# Altium PCB SD171-5.0PCB2.PcbDoc (part 2 of 5)
Units mm, origin at the board's own origin, x right, y up, seen from the top; angles counter-clockwise.
Board outline 152.27 x 99.6 mm, 6 copper layers (Top Layer, InternalPlane1, Mid-Layer 1, Mid-Layer 2, InternalPlane2, Bottom Layer); 325 components, 250 nets, 1794 pads, 490 vias.
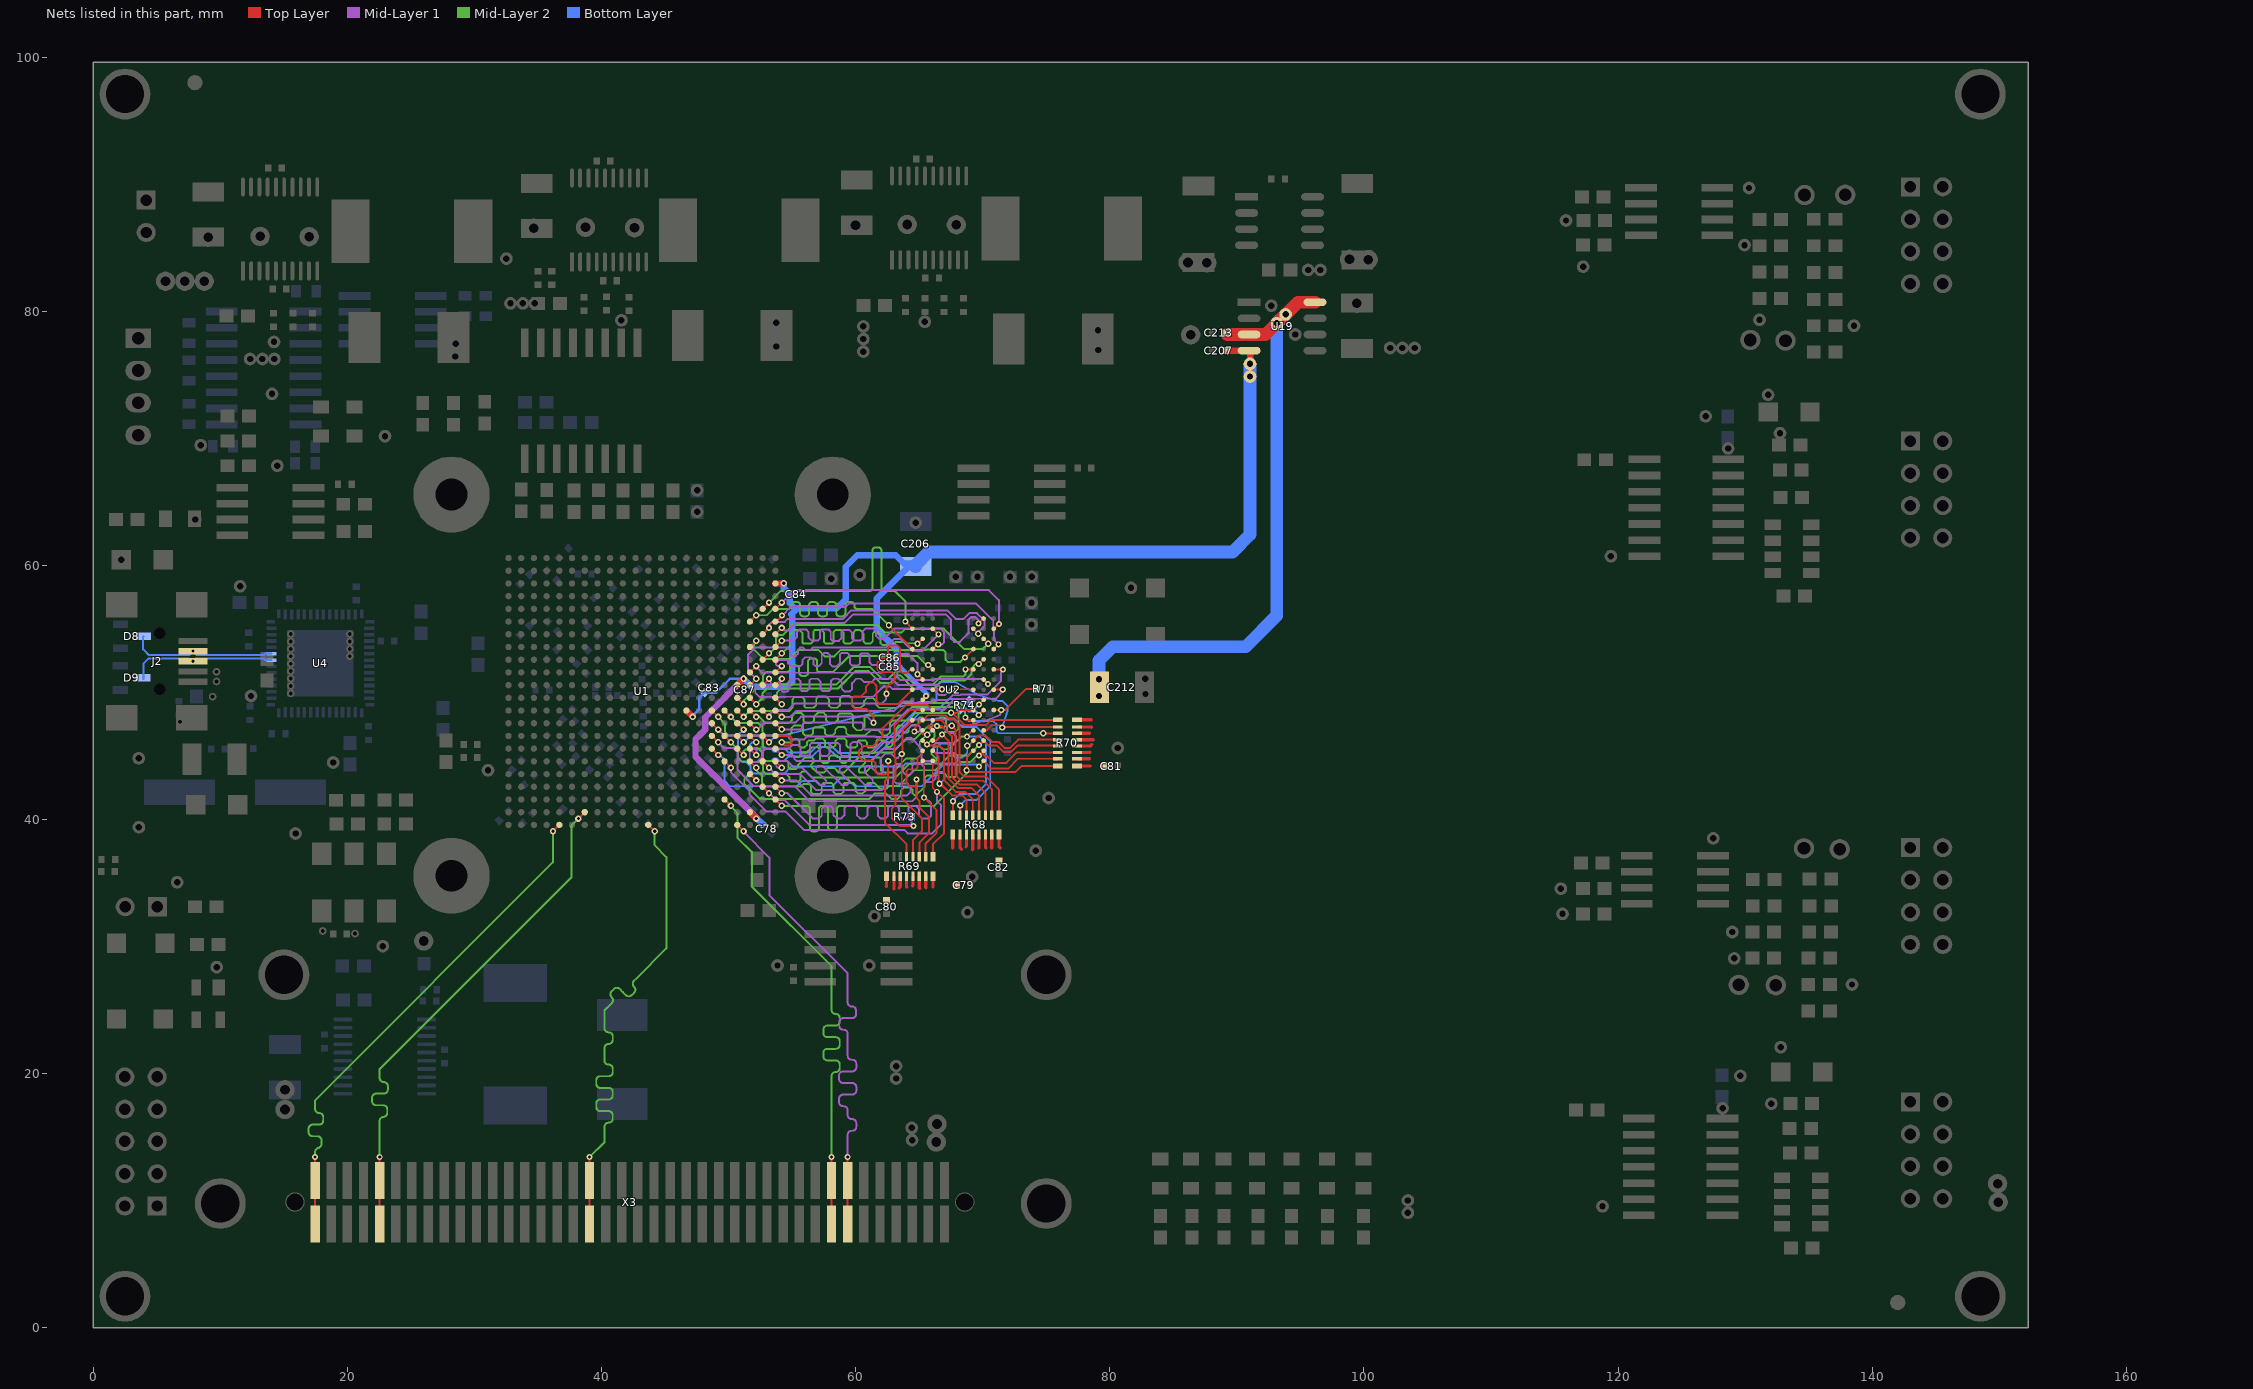
[diagram p6: the nets of this part, all layers, seen from the top]

## Via types
v1: diameter 0.508, hole 0.254, Top Layer to Bottom Layer, 259 vias
v2: diameter 0.483, hole 0.254, Top Layer to Bottom Layer, 230 vias
v3: diameter 0.483, hole 0.254, Top Layer to Bottom Layer, tented top, 1 vias

## Nets (pads, with @x,y where several pads share a name; then routed paths per layer and width w, separated by ;. In a path a pad name is that pad's centre, name@x,y a point inside that pad or via, vN(x,y) a via of type N, cw(c..) or ccw(c..) an arc to the next point about the centre after c; other vN are vias at no path point)
D1_N: D8.3 J2.2 U4.9 | length 11.6
  Bottom Layer w0.159: D8.3@3.948,54.432 3.923,54.407 3.923,53.405 4.369,52.959 7.544,52.959 v2(7.849,53.264) 8.154,52.959 13.411,52.959 13.512,53.059 U4.9@14.017,53.059
D1_P: D9.3 J2.3 U4.8 | length 11.7
  Bottom Layer w0.159: D9.3@3.923,51.054 3.962,51.094 3.962,51.156 3.962,52.299 4.337,52.673 7.544,52.673 7.753,52.464 v2(7.849,52.464) 8.058,52.673 13.437,52.673 13.55,52.559 U4.8@14.017,52.559
DDR2_A0: R70.2 U1.H2 U2.M8 | length 29.8
  Top Layer w0.152: U1.H2@52.68,46.589 v1(53.18,46.089) ; U2.M8@70.065,47.029 70.314,47.029 70.714,47.429 71.348,47.429 v2(71.533,47.244) 71.582,47.293 R70.2@75.899,47.293 R70.2@75.85,47.244
  Bottom Layer w0.152: v1(53.18,46.089) 53.746,46.655 53.967,46.655 53.991,46.632 54.229,46.632 54.232,46.635 64.973,49.251 65.094,49.268 66.261,49.268 66.358,49.365 66.358,50.586 66.597,50.825 67.818,50.825 69.71,49.797 71.278,49.352 71.552,49.352 71.945,48.959 71.945,48.565 71.934,48.541 v2(71.533,47.244) v2@71.552,47.244
DDR2_A1: R68.3 U1.H1 U2.M3 | length 35.2
  Top Layer w0.127: U2.M3@65.95,47.029 U2.M3@66.065,47.029 ; v2@66.384,47.371 v2(66.396,47.371)
  Top Layer w0.152: U1.H1@53.68,46.589 54.833,46.589 54.966,46.457 54.966,45.979 54.824,45.837 54.432,45.837 v1(54.18,46.089) ; U2.M3@65.95,47.029 65.735,47.244 65.735,47.422 66.206,47.422 66.238,47.455 66.301,47.455 v2@66.384,47.371 ; v2(66.396,47.371) 66.778,47.371 67.577,46.572 67.577,43.37 68.186,42.761 69.558,42.761 70.212,42.107 R68.3@70.212,40.357
  Mid-Layer 2 w0.152: v1(54.18,46.089) 54.903,46.089 55.181,46.367 55.385,46.367 55.575,46.177 55.575,45.834 55.728,45.682 55.956,45.682 56.185,45.91 56.185,46.111 56.312,46.238 56.728,46.238 56.896,46.406 57.403,46.406 57.582,46.227 57.582,45.796 57.696,45.682 58.229,45.682 58.42,45.872 58.42,46.228 58.572,46.38 59.13,46.38 59.284,46.227 59.284,45.809 59.411,45.682 59.982,45.682 60.122,45.822 60.122,46.136 60.223,46.238 60.735,46.238 60.884,46.089 60.884,45.783 60.985,45.682 61.455,45.682 61.646,45.872 61.646,46.253 61.709,46.316 61.937,46.316 62.016,46.238 62.259,46.238 62.408,46.089 62.408,45.783 62.471,45.72 62.713,45.72 62.903,45.91 62.903,46.19 63.017,46.304 63.297,46.304 63.398,46.406 63.398,46.609 63.195,46.812 63.195,47.206 63.386,47.396 63.652,47.396 63.729,47.32 63.729,46.965 63.83,46.863 64.084,46.863 64.173,46.952 64.173,47.18 64.465,47.473 64.821,47.473 64.944,47.596 64.944,47.952 65.049,48.057 65.227,48.057 65.43,47.854 66.446,47.854 66.65,48.057 67.005,48.057 67.107,47.955 67.107,47.422 66.929,47.244 v2@66.523,47.244
DDR2_A2: R68.8 U1.H5 U2.M7 | length 34.7
  Top Layer w0.127: v2@68.758,46.584 69.203,47.029 U2.M7@69.265,47.029
  Top Layer w0.152: U1.H5@49.68,46.589 v1(50.18,46.089) ; R68.8@67.642,40.357 67.666,40.38 v2(67.666,41.453)
  Mid-Layer 2 w0.152: v1(50.18,46.089) 50.723,45.546 50.723,44.899 51.045,44.577 51.892,44.577 ; 51.923,44.546 52.431,44.546 52.723,44.254 52.723,43.823 52.959,43.586 54.559,43.586 54.788,43.358 54.788,43.104 54.889,43.002 55.499,43.002 55.651,43.155 55.651,43.663 55.778,43.79 56.109,43.79 56.591,43.307 63.119,43.307 64.212,44.4 66.142,44.4 66.345,44.602 66.345,44.806 65.964,45.187 65.964,45.463 66.297,45.796 66.599,45.796 66.853,45.542 67.319,45.542 68.31,46.533 v2(68.758,46.533)
  Bottom Layer w0.152: v2(67.666,41.453) 67.589,41.453 68.174,42.037 69.469,42.037 70.256,42.824 70.256,46.05 69.774,46.533 v2(68.758,46.533)
DDR2_A3: R68.5 U1.K6 U2.N2 | length 33.4
  Top Layer w0.152: U1.K6@48.68,48.589 v1(49.18,48.089) ; U2.N2@65.265,46.229 65.284,46.229 v2(65.603,45.91) 65.671,45.842 66.579,45.842 66.954,45.466 66.954,43.104 67.869,42.189 68.631,42.189 69.212,41.608 R68.5@69.212,40.357
  Mid-Layer 2 w0.152: v1(49.18,48.089) 49.708,47.561 49.708,46.914 49.991,46.632 52.428,46.632 52.705,46.355 52.705,45.822 52.908,45.618 54.762,45.618 54.966,45.415 54.966,45.06 55.114,44.911 55.503,44.911 55.651,45.06 55.651,45.161 55.778,45.288 56.159,45.288 56.572,45.701 57.029,45.701 57.188,45.542 57.188,44.689 57.415,44.463 57.798,44.463 57.912,44.577 57.912,44.907 58.064,45.06 58.522,45.06 58.776,44.806 58.776,44.602 58.915,44.463 59.22,44.463 59.538,44.78 59.538,45.11 59.715,45.288 62.922,45.288 63.983,46.349 64.656,46.349 65.576,47.269 65.811,47.269 66.218,46.863 66.218,46.526 v2(65.603,45.91)
DDR2_A4: R70.5 U1.F3 U2.N8 | length 31.8
  Top Layer w0.127: v2(69.698,45.872) v2@69.708,45.872
  Top Layer w0.152: U1.F3@51.68,44.589 v1(52.18,44.089) ; v2@69.708,45.872 U2.N8@70.065,46.229 70.473,45.822 71.069,45.822 71.139,45.822 71.647,45.314 72.212,45.314 72.72,45.822 75.871,45.822 R70.5@75.899,45.793
  Mid-Layer 2 w0.152: v1(52.18,44.089) 52.18,43.908 52.637,43.451 52.637,42.892 52.934,42.596 55.702,42.596 55.931,42.824 56.312,42.824 56.49,42.647 56.49,42.165 56.617,42.038 57.202,42.038 57.328,42.164 57.328,42.748 57.48,42.901 58.09,42.901 58.242,42.748 58.242,42.189 58.394,42.038 58.878,42.038 59.055,42.215 59.055,42.799 59.157,42.901 59.817,42.901 59.995,42.723 59.995,42.24 60.173,42.062 60.554,42.062 60.782,42.291 60.782,42.697 60.985,42.901 61.443,42.901 61.874,42.469 62.459,42.469 62.636,42.647 63.348,42.647 64.592,43.891 66.243,43.891 67.405,45.053 68.878,45.053 v2(69.698,45.872)
DDR2_A5: R68.4 U1.K3 U2.N3 | length 33.6
  Top Layer w0.152: U1.K3@51.68,48.589 v1(52.18,48.089) ; U2.N3@66.065,46.229 66.321,46.229 v2(66.802,46.711) 67.297,46.215 67.297,43.255 68.071,42.481 69.126,42.481 69.712,41.896 R68.4@69.712,40.357
  Mid-Layer 2 w0.152: v1@52.419,48.089 52.883,47.625 54.762,47.625 54.991,47.854 54.991,48.158 55.245,48.412 55.702,48.412 55.88,48.235 55.88,47.803 56.058,47.625 56.54,47.625 56.718,47.803 56.718,48.082 57.074,48.438 57.455,48.438 57.658,48.235 57.658,47.854 57.887,47.625 58.369,47.625 58.598,47.854 58.598,48.209 58.75,48.362 59.614,48.362 59.792,48.184 59.792,47.317 60.071,47.038 60.424,47.038 60.681,47.295 60.681,47.981 60.909,48.209 63.779,48.209 64.44,48.87 67.869,48.87 68.097,48.641 68.097,47.168 67.843,46.914 67.005,46.914 v2(66.802,46.711)
DDR2_A6: R70.4 U1.J4 U2.N7 | length 33
  Top Layer w0.152: U1.J4@50.68,47.589 v1(51.18,47.089) ; v2(68.781,45.823) 68.859,45.823 U2.N7@69.265,46.229 69.653,46.617 70.226,46.617 70.728,46.114 71.242,46.114 71.721,45.635 72.127,45.635 72.785,46.293 73.177,46.293 R70.4@75.899,46.293
  Bottom Layer w0.152: v1(51.18,47.089) 50.723,46.632 50.723,44.899 51.076,44.546 51.369,44.546 51.723,44.193 51.723,43.899 51.991,43.632 54.369,43.632 54.908,44.171 63.703,44.171 63.957,44.425 66.091,44.425 66.418,44.752 66.418,45.717 66.675,45.974 67.31,45.974 67.513,45.771 67.513,45.237 67.869,44.882 68.402,44.882 68.781,45.261 v2(68.781,45.823)
DDR2_A7: R69.3 U1.H6 U2.P2 | length 31.7
  Top Layer w0.152: U1.H6@48.68,46.589 v1(49.18,46.089) ; v2(64.795,43.155) 64.795,42.774 ; R69.3@65.005,37.08 65.005,38.176 65.761,38.932 65.761,40.24 65.005,40.996 65.005,41.478 64.795,41.688 64.795,42.774 ; U2.P2@65.265,45.429 65.265,45.216 64.878,44.829 64.878,44.133 64.713,43.967 64.135,43.967 63.983,43.815 63.983,42.901 64.287,42.596 64.618,42.596 64.795,42.774
  Mid-Layer 1 w0.152: v1(49.18,46.089) 49.637,45.632 50.381,45.632 50.711,45.302 50.711,43.911 51.439,43.184 51.991,42.632 55.211,42.632 56.39,41.453 64.44,41.453 64.795,41.808 v2(64.795,43.155)
DDR2_A8: R70.6 U1.E3 U2.P8 | length 32.2
  Top Layer w0.127: U2.P8@70.065,45.427 U2.P8@70.065,45.429 U2.P8@70.116,45.429
  Top Layer w0.152: U1.E3@51.68,43.589 v1(52.18,43.089) ; v2(69.698,45.06) 70.065,45.427 70.065,45.098 70.147,45.017 70.325,45.017 70.866,44.475 71.857,44.475 72.674,45.293 R70.6@75.899,45.293
  Mid-Layer 2 w0.152: v1(52.18,43.089) 51.759,43.51 51.562,43.51 51.232,43.18 51.232,42.824 51.383,42.673 51.422,42.673 52.439,41.656 52.787,41.656 52.811,41.632 61.087,41.632 61.518,42.062 62.382,42.062 62.813,41.632 63.298,41.632 63.551,41.885 63.551,42.275 63.795,42.52 64.313,42.52 64.465,42.367 64.465,42.088 64.647,41.906 64.746,41.906 65.405,42.566 65.405,43.256 65.634,43.485 66.412,43.485 66.581,43.654 66.961,43.654 67.258,43.358 67.793,43.358 67.945,43.51 67.945,44.246 68.224,44.525 69.03,44.525 v2@69.564,45.06
DDR2_A9: R68.6 U1.E1 U2.P3 | length 29.2
  Top Layer w0.152: U1.E1@53.68,43.589 v1(54.18,43.089) ; U2.P3@66.065,45.429 66.065,45.415 66.523,44.958 v2@66.523,42.901 ; v2(66.599,42.824) 66.675,42.824 67.589,41.91 68.402,41.91 68.712,41.6 R68.6@68.712,40.357
  Mid-Layer 1 w0.152: v1(54.18,43.089) 55.311,43.089 56.49,41.91 64.059,41.91 64.313,42.164 64.313,42.596 64.059,42.85 63.195,42.85 62.967,43.078 62.967,44.171 63.17,44.374 63.551,44.374 63.729,44.196 63.729,43.739 63.932,43.536 64.262,43.536 64.453,43.726 64.453,44.259 64.668,44.475 65.026,44.475 65.38,44.122 65.38,43.231 65.659,42.951 65.989,42.951 66.294,43.256 66.294,43.612 66.446,43.764 66.827,43.764 67.005,43.586 67.005,43.231 v2(66.599,42.824)
DDR2_A10: R68.7 U1.G4 U2.M2 | length 39.3
  Top Layer w0.127: U2.M2@65.265,47.029 U2.M2@65.29,47.029 ; v2@65.582,46.731 v2(65.631,46.682) v2@65.631,46.688
  Top Layer w0.152: U1.G4@50.68,45.589 v1(51.18,45.089) ; U2.M2@65.265,47.029 65.265,46.749 65.283,46.731 v2@65.582,46.731 ; R68.7@68.212,40.357 68.212,41.11 v2(68.224,41.123)
  Mid-Layer 2 w0.152: v1(51.18,45.089) 51.18,45.389 51.308,45.517 51.417,45.517 51.492,45.593 52.426,45.593 52.68,45.339 52.68,44.806 52.854,44.632 54.572,44.632 54.726,44.477 54.726,44.118 54.864,43.98 55.283,43.98 55.474,44.171 55.474,44.325 56.043,44.895 56.553,44.895 56.676,44.771 56.676,44.51 56.464,44.298 56.464,44.196 56.68,43.98 56.703,43.98 56.983,43.701 57.493,43.701 57.658,43.866 57.658,43.942 57.785,44.069 58.318,44.069 58.687,43.701 59.068,43.701 60.261,44.895 60.592,44.895 60.731,44.755 60.731,44.45 60.249,43.967 60.249,43.777 60.325,43.701 60.744,43.701 61.265,44.221 61.265,44.628 61.531,44.895 61.912,44.895 62.001,44.806 62.001,43.878 62.179,43.701 62.878,43.701 63.995,44.818 64.846,44.818 65.229,45.202 65.229,45.494 65.044,45.679 65.044,46.142 v2@65.584,46.682
  Bottom Layer w0.152: v2(65.631,46.682) 65.951,47.003 65.951,47.555 66.364,47.968 67.704,47.968 68.377,47.295 69.469,47.295 70.592,46.172 70.592,42.626 69.52,41.554 68.656,41.554 v2(68.224,41.123)
DDR2_A11: R70.8 U1.C1 U2.P7 | length 32.5
  Top Layer w0.152: U1.C1@53.68,41.589 v1(54.18,41.089) ; v2(68.732,43.891) v2@68.751,43.873 ; U2.P7@69.265,45.429 68.751,44.915 68.751,43.891 v2@68.751,43.873 ; R70.8@75.899,44.223 73.027,44.223 72.549,43.745 68.878,43.745 v2@68.751,43.873
  Top Layer w0.254: v2(68.732,43.891) v2@68.751,43.891
  Mid-Layer 2 w0.152: v1(54.18,41.089) 56.139,41.089 cw(c56.139,40.84) 56.388,40.84 56.388,39.328 ccw(c56.637,39.328) 56.637,39.079 56.85,39.079 ccw(c56.85,39.328) 57.099,39.328 57.099,40.84 cw(c57.348,40.84) 57.348,41.089 57.561,41.089 cw(c57.561,40.84) 57.81,40.84 57.81,39.441 ccw(c58.059,39.441) 58.059,39.192 58.273,39.192 ccw(c58.273,39.441) 58.522,39.441 58.522,40.84 cw(c58.771,40.84) 58.771,41.089 66.195,41.089 68.758,43.651
DDR2_A12: R69.2 U1.D1 U2.R2 | length 30.7
  Top Layer w0.152: U1.D1@53.68,42.589 v1(54.18,42.089) ; U2.R2@65.265,44.629 65.354,44.54 65.354,41.732 v2@65.367,41.719 ; v2(65.38,41.732) 66.37,40.742 66.37,38.991 65.505,38.125 R69.2@65.505,37.08
  Mid-Layer 1 w0.152: v1(54.18,42.089) 54.634,42.089 56.617,40.107 57.125,40.107 57.328,40.31 57.328,40.856 57.531,41.059 58.026,41.059 58.234,40.852 58.234,40.369 58.496,40.107 58.877,40.107 59.106,40.335 59.106,40.907 59.258,41.059 59.982,41.059 60.096,40.945 60.096,40.361 60.35,40.107 60.706,40.107 60.935,40.335 60.935,40.907 61.087,41.059 61.608,41.059 61.747,40.919 61.747,40.31 61.951,40.107 62.357,40.107 62.535,40.284 62.535,40.932 62.662,41.059 63.259,41.059 63.398,40.919 63.398,40.284 63.576,40.107 64.008,40.107 64.16,40.259 64.16,40.932 64.287,41.059 64.757,41.059 64.973,40.843 64.973,40.335 65.227,40.081 65.71,40.081 65.938,40.31 65.938,41.275 v2@65.481,41.732
DDR2_A13: R70.7 U1.G6 U2.R8 | length 31.8
  Top Layer w0.127: v2(69.698,44.196) 70.065,44.564 U2.R8@70.065,44.629
  Top Layer w0.152: U1.G6@48.68,45.589 v1(49.18,45.089) ; U2.R8@70.065,44.629 70.669,44.025 71.99,44.025 72.759,44.793 R70.7@75.616,44.793
  Top Layer w0.254: R70.7@75.616,44.793 R70.7@75.899,44.793
  Bottom Layer w0.152: v1(49.18,45.089) 49.298,45.089 49.682,44.704 49.682,43.053 50.104,42.632 55.382,42.632 55.804,43.053 56.906,43.053 57.328,42.632 58.151,42.632 58.75,43.231 59.345,43.231 59.944,42.632 65.187,42.632 66.891,44.336 69.558,44.336 v2(69.698,44.196)
DDR2_A14: R69.1 U1.F5 U2.R3 | length 31.1
  Top Layer w0.152: U1.F5@49.68,44.589 v1(50.18,44.089) ; U2.R3@66.065,44.629 66.065,42.52 v2(66.396,42.189) 66.954,41.631 66.954,38.938 66.075,38.059 R69.1@66.075,37.08
  Mid-Layer 1 w0.152: v1(50.18,44.089) 50.18,43.735 51.637,42.278 51.637,41.985 52.991,40.632 54.491,40.632 55.931,39.192 63.808,39.192 64.084,38.916 66.017,38.916 66.726,39.624 66.726,41.123 66.396,41.453 v2(66.396,42.189)
DDR2_BA0: R68.1 U1.G3 U2.L2 | length 38.2
  Top Layer w0.152: U1.G3@51.68,45.589 v1(52.18,45.089) ; v2@64.694,46.939 64.694,47.277 65.246,47.829 U2.L2@65.265,47.829 65.29,47.829 65.678,48.217 67.074,48.217 67.361,47.93 67.691,47.93 68.186,47.434 68.186,43.726 68.529,43.383 70.256,43.383 71.282,42.358 R68.1@71.282,40.357
  Mid-Layer 1 w0.152: v1(52.18,45.089) 52.18,45.458 52.045,45.593 51.791,45.593 51.664,45.466 51.664,44.755 51.872,44.546 52.242,44.546 52.705,45.009 52.705,45.394 52.857,45.546 54.665,45.546 54.991,45.872 55.474,45.872 55.651,45.695 55.651,45.187 55.804,45.034 56.286,45.034 56.413,45.161 56.413,45.923 56.54,46.05 57.048,46.05 57.175,45.923 57.175,45.187 57.353,45.009 57.76,45.009 57.937,45.187 57.937,45.898 58.09,46.05 58.572,46.05 58.776,45.847 58.776,45.187 58.953,45.009 59.385,45.009 59.588,45.212 59.588,45.923 59.792,46.126 60.249,46.126 60.477,45.898 60.477,45.187 60.655,45.009 60.935,45.009 61.239,45.314 62.027,46.101 63.068,46.101 64.364,47.396 64.948,47.396 65.075,47.269 65.075,47.041 64.948,46.914 64.643,46.914 v2(64.618,46.939)
DDR2_BA1: R68.2 U1.G1 U2.L3 | length 34.5
  Top Layer w0.152: U1.G1@53.68,45.589 v1(54.18,45.089) ; U2.L3@66.065,47.829 66.75,47.829 67.183,47.396 v2(67.564,47.396) 67.869,47.092 67.869,43.51 68.313,43.066 70.04,43.066 70.712,42.394 R68.2@70.712,40.357
  Mid-Layer 1 w0.152: v1(54.18,45.089) 55.013,45.089 55.168,44.933 55.168,44.806 55.372,44.602 61.162,44.602 62.128,45.569 63.171,45.569 64.033,46.431 64.364,46.431 65.176,45.618 65.176,44.882 65.456,44.602 66.091,44.602 66.269,44.425 67.843,44.425 67.996,44.577 67.996,45.085 67.843,45.237 66.294,45.237 66.116,45.415 66.116,45.847 66.294,46.025 67.666,46.025 67.894,46.253 67.894,46.584 67.64,46.838 67.361,46.838 67.183,47.015 67.183,47.295 67.285,47.396
DDR2_BA2: R69.4 U1.F1 U2.L1 | length 34.4
  Top Layer w0.152: U1.F1@53.68,44.589 v1(54.18,44.089) ; v2(63.627,45.161) 63.627,41.681 65.227,40.081 65.227,39.116 64.505,38.394 R69.4@64.505,37.08 ; v2@63.678,45.161 63.678,47.042 U2.L1@64.465,47.829
  Mid-Layer 1 w0.127: v2@63.573,45.136 63.602,45.136 v2(63.627,45.161)
  Mid-Layer 1 w0.152: v1(54.18,44.089) 53.859,44.089 53.752,44.196 53.752,44.481 53.899,44.628 54.61,44.628 55.149,44.089 55.778,44.089 57.119,42.748 57.531,42.748 57.683,42.901 57.683,43.078 56.896,43.866 56.896,44.069 57.048,44.221 57.404,44.221 58.89,42.735 59.322,42.735 59.461,42.875 59.461,43.078 58.725,43.815 58.725,43.967 58.979,44.221 59.233,44.221 60.719,42.735 61.176,42.735 61.341,42.901 61.341,43.129 60.731,43.739 60.731,44.069 60.884,44.221 61.163,44.221 61.766,43.619 62.021,43.619 62.166,43.764 62.166,44.235 61.951,44.45 61.951,44.809 62.329,45.187 62.792,45.187 63.119,44.859 63.325,44.859 v2@63.602,45.136
DDR2_CAS_B: R70.3 U1.K4 U2.L7 | length 33.3
  Top Layer w0.152: U1.K4@50.68,48.589 v1(51.18,48.089) ; v2@68.706,47.829 U2.L7@69.265,47.829 ; v2(74.765,46.799) 74.771,46.793 R70.3@75.899,46.793
  Mid-Layer 2 w0.152: v1(51.18,48.089) 51.637,48.546 54.756,48.546 55.016,48.806 55.016,49.454 55.22,49.657 55.778,49.657 55.956,49.479 55.956,48.933 56.083,48.806 56.68,48.806 56.896,49.022 56.896,49.53 57.048,49.682 57.683,49.682 57.887,49.479 57.887,48.984 58.064,48.806 58.56,48.806 58.75,48.997 58.75,49.53 58.953,49.733 59.512,49.733 59.69,49.555 59.69,49.035 59.919,48.806 60.414,48.806 60.655,49.047 60.655,49.327 60.884,49.555 61.392,49.555 61.62,49.327 61.62,49.035 61.849,48.806 63.322,48.806 63.71,49.193 68.18,49.193 68.605,48.768 v2@68.605,48.031
  Bottom Layer w0.152: v2@68.605,47.93 v2@68.631,47.93 ; v2(68.631,48.031) 68.91,47.752 70.841,47.752 71.088,47.504 71.088,47.054 71.095,47.047 71.095,46.939 71.234,46.799 v2(74.765,46.799) v2@74.778,46.787
DDR2_CKE: R73.2 U1.D2 U2.K2 | length 26
  Top Layer w0.127: U2.K2@65.265,48.629 U2.K2@65.265,48.654
  Top Layer w0.152: U1.D2@52.68,42.589 v1(53.18,42.089) ; 63.068,44.93 63.068,47.435 64.262,48.629 U2.K2@65.265,48.629 ; 63.119,44.879 63.119,43.205 62.941,43.028 62.941,41.986 63.119,41.808 63.119,41.148 62.84,40.869 62.84,40.132 63.475,39.497 v2(64.541,39.497)
  Mid-Layer 1 w0.152: v1(53.18,42.089) 53.714,41.554 54.381,41.554 56.337,39.599 v2@64.44,39.599
  Bottom Layer w0.152: R73.2@64.407,40.234 64.407,39.632 v2(64.541,39.497)
DDR2_CLK_N: R74.1 U1.H3 U2.K8 | length 24.2
  Top Layer w0.159: U1.H3@51.68,46.589 v1(52.18,46.089) ; v2(69.684,48.248) U2.K8@70.065,48.629
  Mid-Layer 1 w0.152: v1(52.18,46.089) v1@52.23,46.089
  Bottom Layer w0.159: v1(52.18,46.089) 51.855,46.089 51.689,45.923 51.689,45.796 51.892,45.593 52.327,45.593 52.64,45.279 52.64,45.254 52.654,45.241 52.654,44.856 52.888,44.622 53.364,44.622 53.558,44.815 53.782,44.815 53.975,44.622 54.381,44.622 54.739,44.98 56.592,44.98 57.327,45.716 57.759,45.716 58.543,44.933 61.549,44.933 65.026,48.41 66.677,48.41 67.438,49.171 68.249,49.171 68.91,48.511 69.494,48.511 69.684,48.321 v2(69.684,48.248) ; R74.1@68.219,48.636 68.479,48.896
DDR2_CLK_P: R74.2 U1.H4 U2.J8 | length 24.1
  Top Layer w0.127: U2.J8@70.054,49.429 U2.J8@70.065,49.429
  Top Layer w0.159: U1.H4@50.68,46.589 v1(51.18,46.089) ; v2(69.698,49.073) U2.J8@70.054,49.429
  Mid-Layer 1 w0.152: v1(51.18,46.089) v1@51.18,46.176
  Bottom Layer w0.152: v1(51.18,46.089) v1@51.215,46.089 ; R74.2@68.913,49.39 R74.2@68.973,49.39
  Bottom Layer w0.159: v1@51.215,46.089 51.701,46.575 52.381,46.575 52.666,46.29 52.666,45.759 52.876,45.549 53.371,45.549 53.549,45.371 53.811,45.371 53.989,45.549 54.451,45.549 54.708,45.291 56.463,45.291 57.199,46.027 57.888,46.027 58.665,45.25 61.189,45.25 61.191,45.252 61.428,45.252 64.896,48.72 66.547,48.72 67.309,49.482 68.378,49.482 68.692,49.169 ; R74.2@68.913,49.39 68.692,49.169 ; v2(69.698,49.073) 69.694,49.073 69.444,48.822 69.039,48.822 68.692,49.169
DDR2_DQ0: U1.N3 U2.G8 | length 21
  Top Layer w0.152: U1.N3@51.68,51.589 v1(52.18,52.089) ; U2.G8@70.065,51.029 70.078,51.029 v2@70.46,50.648
  Mid-Layer 1 w0.152: v1(52.18,52.089) 52.18,52.036 52.654,51.562 62.001,51.562 62.484,52.045 62.992,52.045 63.271,51.765 63.271,51.232 63.5,51.003 64.897,51.003 ; 64.897,51.003 66.167,51.003 66.228,51.064 69.85,51.064 70.043,51.064 70.46,50.648 70.46,50.597 v2@70.434,50.622
  other v2: 70.409,50.673
DDR2_DQ1: U1.N1 U2.G2 | length 21
  Top Layer w0.152: U1.N1@53.68,51.589 v1@54.18,52.089 ; v2(64.865,51.448) 65.265,51.048 U2.G2@65.265,51.029
  Mid-Layer 1 w0.152: 53.898,52.089 53.855,52.089 53.721,52.222 53.721,52.324 53.975,52.578 54.559,52.578 54.686,52.451 54.686,52.292 54.889,52.089 55.645,52.089 55.804,52.248 55.804,52.553 56.032,52.781 56.464,52.781 56.667,52.578 56.667,52.248 56.82,52.095 57.125,52.095 57.328,52.299 57.328,52.934 57.506,53.111 57.81,53.111 57.988,52.934 57.988,52.248 58.166,52.07 58.522,52.07 58.75,52.299 58.75,52.984 58.877,53.111 59.36,53.111 59.563,52.908 59.563,52.273 59.69,52.146 60.198,52.146 60.35,52.299 60.35,52.984 60.452,53.086 60.935,53.086 61.087,52.934 61.087,52.375 61.29,52.172 61.722,52.172 61.925,52.375 61.925,52.908 62.052,53.035 62.433,53.035 62.789,52.68 63.221,52.68 63.576,53.035 64.135,53.035 64.852,52.318 64.852,51.435 v2(64.865,51.448)
  other v1: 54.18,52.09
DDR2_DQ2: U1.M2 U2.H7 | length 21
  Top Layer w0.152: U1.M2@52.68,50.589 v1(53.18,51.089) ; v2(67.615,50.267) 69.228,50.267 U2.H7@69.265,50.229
  Mid-Layer 1 w0.152: v1(53.18,51.089) 53.315,50.954 53.315,50.673 53.146,50.505 52.349,50.505 52.095,50.251 52.095,50.003 52.426,49.673 61.387,49.673 62.209,50.495 62.687,50.495 62.909,50.273 66.097,50.273 66.554,49.816 67.037,49.816 67.488,50.267 v2(67.615,50.267)
DDR2_DQ3: U1.M1 U2.H3 | length 21
  Top Layer w0.152: U1.M1@53.68,50.589 v1@54.18,51.089 ; U2.H3@66.065,50.229 66.765,50.229 v2(66.802,50.267)
  Mid-Layer 1 w0.152: v1@54.165,51.067 v1@54.18,51.081 ; v1@54.18,51.089 v1@54.18,51.081 ; v2(66.802,50.267) 66.484,50.584 63.344,50.584 62.84,51.089 61.519,51.089 61.255,50.825 60.681,50.825 60.417,51.089 60.055,51.089 59.715,50.749 59.715,50.267 59.538,50.089 59.106,50.089 58.903,50.292 58.903,50.825 58.639,51.089 58.217,51.089 58.064,50.936 58.064,50.317 57.861,50.114 57.404,50.114 57.226,50.292 57.226,50.876 57.014,51.089 56.49,51.089 56.363,50.962 56.363,50.317 56.185,50.14 55.753,50.14 55.651,50.241 55.651,50.902 55.464,51.089 54.966,51.089 54.788,50.911 54.788,50.267 54.601,50.079 54.254,50.079 54.061,50.273 54.061,50.933 54.18,51.052 v1@54.18,51.081
  other v1: 54.199,51.095
DDR2_DQ4: U1.J3 U2.H1 | length 21
  Top Layer w0.152: U1.J3@51.68,47.589 v1(52.18,47.089) ; v2(61.392,47.625) 61.392,48.158 60.833,48.717 59.944,48.717 59.69,48.971 59.69,49.505 59.893,49.708 60.452,49.708 60.808,50.063 60.808,50.444 61.163,50.8 61.366,50.8 61.646,50.521 61.646,49.301 61.842,49.105 63.341,49.105 U2.H1@64.465,50.229
  Mid-Layer 1 w0.152: v1@52.266,47.089 52.808,47.632 55.226,47.632 55.702,48.108 60.909,48.108 v2(61.392,47.625)
DDR2_DQ5: U1.J1 U2.H9 | length 21
  Top Layer w0.152: U1.J1@53.68,47.589 v1@54.18,47.089 ; U2.H9@70.865,50.229 v2@71.565,50.229
  Mid-Layer 1 w0.152: v1@54.18,47.089 55.649,47.089 55.855,47.295 55.855,47.549 55.956,47.65 60.477,47.65 60.59,47.538 60.59,47.23 60.731,47.089 62.507,47.089 64.084,48.666 66.954,48.666 67.805,49.517 68.58,49.517 71.006,49.517 71.577,50.089 v2(71.577,50.241)
  other v1: 54.18,47.114
DDR2_DQ6: U1.K2 U2.F1 | length 21
  Top Layer w0.152: U1.K2@52.68,48.589 v1(53.18,48.089) ; v2@62.441,49.944 62.441,50.292 62.441,50.3 62.441,50.452 62.713,50.724 62.865,50.724 63.068,50.927 63.068,51.41 62.865,51.613 61.925,51.613 61.722,51.816 61.722,52.4 62.001,52.68 62.433,52.68 62.56,52.807 62.56,53.518 62.738,53.696 63.297,53.696 63.475,53.518 63.475,51.765 63.703,51.537 64.033,51.537 64.326,51.829 U2.F1@64.465,51.829
  Mid-Layer 1 w0.152: v1@53.111,48.157 v1(53.18,48.089) ; v1@53.194,48.089 v1(53.18,48.089) ; v1(53.18,48.089) 53.18,48.263 53.533,48.616 54.645,48.616 55.169,49.14 62.068,49.14 62.382,49.454 v2@62.382,49.86 ; v2@62.382,49.86 v2(62.433,49.911) 62.433,49.809 v2@62.382,49.86
DDR2_DQ7: U1.K1 U2.F9 | length 20.9
  Top Layer w0.152: U1.K1@53.68,48.589 v1(54.18,48.089) ; U2.F9@70.865,51.829 v2@71.589,51.829
  Mid-Layer 1 w0.152: v1(54.18,48.089) 54.845,48.089 55.296,48.539 62.992,48.539 63.764,49.312 64.459,49.312 64.597,49.174 65.862,49.174 66.116,49.428 67.285,49.428 67.678,49.822 68.263,49.822 68.275,49.835 70.358,49.835 71.438,50.914 71.438,51.651 v2(71.603,51.816)
DDR2_DQ8: U1.P2 U2.C8 | length 21
  Top Layer w0.152: U1.P2@52.68,52.589 v1(53.18,53.089) ; U2.C8@70.065,54.229 v2@70.44,53.854
  Mid-Layer 2 w0.127: v1(53.18,53.089) v1@53.241,53.089
  Mid-Layer 2 w0.152: v1@53.241,53.089 53.723,53.57 53.723,54.278 53.991,54.546 54.284,54.546 55.042,55.304 61.739,55.304 62.306,54.737 63.627,54.737 63.906,55.016 66.157,55.016 66.17,55.029 66.942,55.029 68.542,53.429 69.38,53.429 69.384,53.433 70.019,53.433 v2(70.434,53.848)
DDR2_DQ9: U1.P1 U2.C2 | length 21
  Top Layer w0.152: U1.P1@53.68,52.589 v1(54.18,53.089) ; v2@64.878,53.842 U2.C2@65.265,54.229
  Mid-Layer 2 w0.152: v1(54.18,53.089) 54.232,53.089 54.813,53.67 54.813,54.536 55.192,54.915 55.601,54.915 55.804,54.712 55.804,53.937 55.893,53.848 56.464,53.848 56.667,54.051 56.667,54.8 56.794,54.927 57.315,54.927 57.506,54.737 57.506,54 57.658,53.848 58.141,53.848 58.268,53.975 58.268,54.775 58.42,54.927 58.839,54.927 59.055,54.712 59.055,53.975 59.182,53.848 59.588,53.848 59.842,54.102 59.842,54.75 60.02,54.927 60.338,54.927 60.604,54.661 60.604,54.026 60.782,53.848 61.138,53.848 61.341,54.051 61.341,54.661 61.443,54.762 61.724,54.762 61.952,54.535 61.952,53.898 62.09,53.759 62.509,53.759 62.636,53.886 63.068,53.886 63.17,53.988 63.957,53.988 64.059,53.886 64.834,53.886 v2(64.872,53.848)
DDR2_DQ10: U1.R3 U2.D7 | length 21
  Top Layer w0.152: U1.R3@51.68,53.589 v1(52.18,54.089) ; v2(68.605,52.769) U2.D7@69.265,53.429
  Mid-Layer 2 w0.127: v1@52.134,54.089 v1(52.18,54.089)
  Mid-Layer 2 w0.152: v1@52.134,54.089 51.994,53.949 51.994,53.416 52.778,52.632 54.775,52.632 55.509,53.365 57.048,53.365 57.556,52.857 58.318,52.857 58.826,53.365 65.545,53.365 65.558,53.378 66.288,53.378 66.313,53.353 66.904,53.353 67.081,53.175 67.081,52.578 67.234,52.426 68.236,52.426 68.58,52.769 v2(68.605,52.769)
DDR2_DQ11: U1.R1 U2.D3 | length 21
  Top Layer w0.152: U1.R1@53.68,53.589 v1(54.18,54.089) ; U2.D3@66.065,53.429 v2@66.433,53.797
  Mid-Layer 1 w0.152: v1(54.18,54.089) 55.105,54.089 55.372,54.356 55.372,54.737 55.601,54.966 56.095,54.966 56.293,54.769 56.293,54.324 56.528,54.089 57.01,54.089 57.175,54.254 57.175,54.788 57.353,54.966 57.861,54.966 58.039,54.788 58.039,54.204 58.166,54.077 58.674,54.077 58.867,54.27 58.867,54.803 59.004,54.94 59.487,54.94 59.715,54.712 59.715,54.241 59.868,54.089 60.376,54.089 60.554,54.267 60.554,54.839 60.757,55.042 61.443,55.042 61.595,54.889 61.595,54.483 61.811,54.267 62.268,54.267 63.043,55.042 66.192,55.042 66.205,55.029 66.707,55.029 66.967,54.769 66.967,53.962 66.802,53.797 v2(66.497,53.797)
DDR2_DQ12: U1.U3 U2.D1 | length 21
  Top Layer w0.152: U1.U3@51.68,55.589 v1(52.18,56.089) ; v2(62.611,55.296) 64.465,53.442 U2.D1@64.465,53.429
  Mid-Layer 2 w0.152: v1(52.18,56.089) 52.68,56.089 ; 52.979,56.089 52.68,56.089 ; v2(62.611,55.296) 61.341,56.566 60.401,56.566 60.142,56.566 cw(c60.142,56.815) 59.893,56.815 59.893,56.879 ccw(c59.644,56.879) 59.644,57.128 59.431,57.128 ccw(c59.431,56.879) 59.182,56.879 59.182,56.566 59.182,56.253 cw(c58.933,56.253) 58.933,56.004 58.72,56.004 cw(c58.72,56.253) 58.471,56.253 58.471,56.566 58.471,56.879 ccw(c58.222,56.879) 58.222,57.128 58.009,57.128 ccw(c58.009,56.879) 57.76,56.879 57.76,56.566 57.76,56.253 cw(c57.511,56.253) 57.511,56.004 57.297,56.004 cw(c57.297,56.253) 57.048,56.253 57.048,56.566 57.048,56.879 ccw(c56.799,56.879) 56.799,57.128 56.586,57.128 ccw(c56.586,56.879) 56.337,56.879 56.337,56.566 56.337,56.253 cw(c56.088,56.253) 56.088,56.004 55.875,56.004 cw(c55.875,56.253) 55.626,56.253 55.626,56.566 55.626,56.879 ccw(c55.377,56.879) 55.377,57.128 55.164,57.128 ccw(c55.164,56.879) 54.915,56.879 54.915,56.815 cw(c54.666,56.815) 54.666,56.566 54.559,56.566 53.461,56.566 52.984,56.089 52.68,56.089
DDR2_DQ13: U1.U1 U2.D9 | length 21
  Top Layer w0.152: U1.U1@53.68,55.589 53.735,55.589 v2(54.204,56.058) ; U2.D9@70.865,53.429 71.233,53.797 v2(71.247,53.797)
  Mid-Layer 1 w0.152: v2(54.204,56.058) 54.889,56.744 59.207,56.744 59.487,57.023 69.456,57.023 70.828,55.651 70.828,54.876 70.879,54.826 70.879,54.165 v2(71.247,53.797) v2@71.349,53.797
DDR2_DQ14: U1.V2 U2.B1 | length 21
  Top Layer w0.152: U1.V2@52.68,56.589 v1(53.18,57.089) ; v2(63.906,55.601) 64.465,55.042 U2.B1@64.465,55.029
  Mid-Layer 2 w0.152: v1(53.18,57.089) 54.079,57.988 55.479,57.988 55.585,57.988 60.223,57.988 61.067,57.988 ccw(c61.067,58.237) 61.316,58.237 61.316,61.17 cw(c61.565,61.17) 61.565,61.419 61.778,61.419 cw(c61.778,61.17) 62.027,61.17 62.027,58.237 ccw(c62.276,58.237) 62.276,57.988 62.738,57.988 63.094,57.988 63.906,57.175 v2(63.906,55.601)
DDR2_DQ15: U1.V1 U2.B9 | length 21
  Top Layer w0.152: U1.V1@53.68,56.589 v1(54.18,57.089) ; U2.B9@70.865,55.029 71.259,55.423 v2(71.272,55.409)
  Mid-Layer 1 w0.152: v1(54.18,57.089) 55.156,58.064 70.485,58.064 71.272,57.277 v2(71.272,55.409)
DDR2_LDM: U1.L4 U2.F3 | length 21
  Top Layer w0.152: U1.L4@50.68,49.589 v1(51.18,49.089) ; v2@65.716,52.178 U2.F3@66.065,51.829
  Mid-Layer 2 w0.152: v1(51.18,49.089) 51.18,49.377 52.723,50.919 52.723,51.362 52.992,51.632 54.483,51.632 54.59,51.632 ccw(c54.59,51.881) 54.839,51.881 cw(c55.088,51.881) 55.088,52.129 55.301,52.129 cw(c55.301,51.881) 55.55,51.881 55.55,51.632 55.55,51.567 ccw(c55.799,51.567) 55.799,51.318 56.012,51.318 ccw(c56.012,51.567) 56.261,51.567 56.261,51.632 56.261,52.443 cw(c56.51,52.443) 56.51,52.692 56.723,52.692 cw(c56.723,52.443) 56.972,52.443 56.972,51.759 ccw(c57.099,51.759) 57.099,51.632 58.236,51.632 59.474,52.87 64.884,52.87 65.583,52.172 v2(65.71,52.172)
DDR2_LDQS_N: U1.L1 U2.E8 | length 21
  Top Layer w0.159: U1.L1@53.68,49.589 v1(54.18,49.089) ; v2@69.698,52.262 U2.E8@70.065,52.629
  Mid-Layer 2 w0.159: v1(54.18,49.089) 53.79,49.479 53.79,50.005 54.108,50.324 58.608,50.324 59.994,51.71 60.986,51.71 61.925,50.771 62.713,50.771 63.297,51.356 63.509,51.356 64.54,50.325 66.179,50.325 66.803,50.949 68.581,50.949 69.117,51.486 69.117,51.921 69.457,52.262 v2(69.686,52.262)
DDR2_LDQS_P: U1.L3 U2.F7 | length 21
  Top Layer w0.159: U1.L3@51.68,49.589 v1(52.18,49.089) ; v2(68.644,51.829) U2.F7@69.265,51.829
  Mid-Layer 2 w0.159: v1(52.18,49.089) 52.667,49.575 52.667,49.949 53.346,50.628 54.705,50.628 54.712,50.635 58.479,50.635 59.866,52.021 61.115,52.021 62.054,51.083 62.584,51.083 63.168,51.667 63.638,51.667 64.67,50.635 66.049,50.635 66.674,51.26 68.452,51.26 68.644,51.453 v2(68.644,51.829)
DDR2_ODT: R71.2 U1.J6 U2.K9 | length 28.7
  Top Layer w0.152: U1.J6@48.68,47.589 v1(49.18,47.089) ; U2.K9@70.865,48.629 70.877,48.641 71.501,48.641 71.78,48.641 73.432,50.292 R71.2@74.252,50.292
  Mid-Layer 1 w0.152: v1(49.18,47.089) 49.637,46.632 54.562,46.632 54.889,46.304 55.931,46.304 56.159,46.533 61.554,46.533 ; 61.579,46.507 62.941,46.507 64.304,47.87 67.776,47.87 68.223,47.423 69.142,47.423 69.255,47.536 70.54,47.907 71.349,48.235 v2@71.501,48.641
  other v2: 71.45,48.641
DDR2_RAS_B: R70.1 U1.K5 U2.K7 | length 34
  Top Layer w0.152: U1.K5@49.68,48.589 v1(50.18,48.089) ; v2(67.513,48.412) v2@67.615,48.412 ; U2.K7@69.265,48.629 68.162,48.629 67.945,48.412 v2@67.615,48.412 ; R70.1@75.899,47.863 75.864,47.828 71.12,47.828 70.612,47.828 70.226,47.442 68.592,47.442 68.167,47.866 68.161,47.866 v2@67.615,48.412
  Mid-Layer 2 w0.152: v1(50.18,48.089) 50.669,47.6 52.349,47.6 52.68,47.269 52.68,46.888 52.936,46.632 54.76,46.632 54.966,46.838 54.966,47.219 55.143,47.396 55.712,47.396 55.855,47.253 55.855,46.784 56.007,46.632 56.487,46.632 56.642,46.787 56.642,47.152 56.76,47.269 57.429,47.269 57.582,47.117 57.582,46.784 57.734,46.632 58.189,46.632 58.395,46.838 58.395,47.076 58.614,47.295 59.08,47.295 59.258,47.117 59.258,46.809 59.436,46.632 60.754,46.632 61.176,47.053 61.76,47.053 61.925,46.888 ; 61.925,46.886 62.179,46.632 62.456,46.632 62.713,46.888 62.713,47.625 62.89,47.803 64.135,47.803 ; 64.173,47.841 64.745,48.412 v2(67.513,48.412)
DDR2_UDM: U1.M3 U2.B3 | length 21
  Top Layer w0.127: U2.B3@66.053,55.029 U2.B3@66.065,55.029
  Top Layer w0.152: U1.M3@51.68,50.589 v1(52.18,51.089) ; U2.B3@66.065,55.029 v2@66.484,54.61
  Mid-Layer 1 w0.152: v1(52.18,51.089) 51.511,51.758 51.511,52.959 52.098,53.546 54.607,53.546 54.813,53.34 54.813,53.035 54.966,52.883 55.296,52.883 55.474,53.061 55.474,53.381 55.626,53.533 55.864,53.533 56.058,53.34 56.423,53.34 56.617,53.533 62.347,53.533 63.043,54.229 63.519,54.229 64.474,53.274 65.212,53.274 v2(66.523,54.585)
DDR2_UDQS_N: U1.T1 U2.A8 | length 20.9
  Top Layer w0.127: U2.A8@70.053,55.829 U2.A8@70.065,55.829 U2.A8@70.065,55.868
  Top Layer w0.159: U1.T1@53.68,54.589 v1(54.18,55.089) ; v2(69.672,55.448) U2.A8@70.053,55.829
  Mid-Layer 1 w0.159: v1(54.18,55.089) 54.381,54.887 54.71,54.887 55.315,55.493 59.13,55.493 59.793,56.156 67.08,56.156 67.513,55.723 67.513,54.229 67.742,54 68.199,54 68.859,54.661 68.859,55.728 69.081,55.95 69.399,55.95 69.672,55.677 v2(69.672,55.448)
DDR2_UDQS_P: U1.T2 U2.B7 | length 21
  Top Layer w0.127: U2.B7@69.265,55.017 U2.B7@69.265,55.029
  Top Layer w0.159: U1.T2@52.68,54.589 v1(53.18,55.089) ; U2.B7@69.265,55.017 v2(69.647,54.635)
  Mid-Layer 1 w0.127: v2(69.647,54.635) v2@69.672,54.61
  Mid-Layer 1 w0.152: v1(53.18,55.089) v1@53.26,55.089
  Mid-Layer 1 w0.159: v1(53.18,55.089) 53.18,55.335 53.419,55.575 54.381,55.575 54.384,55.571 54.428,55.571 54.661,55.804 59.001,55.804 59.664,56.467 67.209,56.467 67.868,55.808 68.498,55.808 68.95,56.261 69.528,56.261 70.145,55.644 70.145,55.249 69.647,54.751 v2(69.647,54.635)
DDR2_VREF: C78.2 C83.2 C84.2 C85.2 C86.2 C87.2 C206.1 C207.2 pad.0@91.034,74.879 pad.0@91.034,75.87 U1.B3 U1.K8 U1.M4 U1.Y1 U2.J2 U19.4 | length 107.9
  Top Layer w0.152: U1.Y1@53.68,58.589 U1.Y1@53.689,58.598
  Top Layer w0.254: U2.J2@65.265,49.429 65.304,49.429 v3@65.608,49.733
  Top Layer w0.5: U1.K8@46.68,48.589 v1(47.18,48.089) ; U1.M4@50.68,50.589 v1(51.18,51.089) ; U1.B3@51.68,40.589 v1(52.18,40.089) ; U1.Y1@53.68,58.589 54.322,58.589 v1(54.331,58.598)
  Top Layer w0.508: C207.2@89.121,76.911 U19.4@90.957,76.911 91.034,76.835 pad.0@91.034,75.057
  Mid-Layer 1 w0.254: v3@65.608,49.733 v3@65.634,49.759
  Mid-Layer 1 w0.508: v1(51.18,51.089) 48.158,48.067 48.158,47.092 47.396,46.33 47.396,44.958 v1@52.18,40.174
  Bottom Layer w0.203: v1(47.18,48.089) 47.18,48.196 47.697,48.713 47.697,49.602 C83.2@48.096,50 49.009,50 50.089,51.08 v1@51.18,51.08
  Bottom Layer w0.381: C85.2@63.213,52.045 63.478,52.045 65.608,49.915 v3@65.608,49.733
  Bottom Layer w0.508: v1@51.18,51.08 C87.2@51.65,50.609 51.806,50.454 54.585,50.454 54.991,50.86 54.991,56.109 54.94,56.159 55.308,56.528 ; v1(52.18,40.089) 52.214,40.089 C78.2@52.642,39.661 ; v1(54.331,58.598) 54.331,58.224 C84.2@54.795,57.759 54.815,57.74 54.815,57.021 55.308,56.528 ; C85.2@63.213,52.045 C86.2@63.213,52.756 63.213,53.424 61.646,54.991 61.646,57.379 64.186,59.919 C206.1@64.719,59.919 64.499,60.139 63.813,60.139 63.144,60.808 60.122,60.808 59.207,59.893 59.207,57.353 58.494,56.64 55.421,56.64 55.308,56.528
  Bottom Layer w1.016: C206.1@64.719,59.919 64.719,60.046 65.735,61.062 89.662,61.062 91.034,62.433 pad.0@91.034,75.819
  other v3: 65.532,49.733
DDR2_VTT: C79.2 C80.2 C81.2 C82.2 C212.1 C213.2 pad.0@79.146,49.733 pad.0@79.146,51.054 pad.0@93.137,79.066 pad.0@93.833,79.761 R68.9 R68.10 R68.11 R68.12 R68.13 R68.14 R68.15 R68.16 R69.9 R69.10 R69.11 R69.12 R69.13 R69.14 R69.15 R69.16 R70.9 R70.10 R70.11 R70.12 R70.13 R70.14 R70.15 R70.16 U19.3 U19.8 | length 74.9
  Top Layer w0.254: 62.408,34.747 62.435,34.774 R69.9@62.435,35.556 ; R69.10@63.005,35.556 63.005,34.582 63.017,34.569 ; 63.424,34.646 63.505,34.727 R69.11@63.505,35.556 ; R69.12@64.005,35.556 64.005,34.725 64.033,34.696 ; 64.465,34.773 64.505,34.812 R69.13@64.505,35.556 ; R69.14@65.005,35.556 65.005,34.639 65.049,34.595 ; R69.15@65.505,35.556 65.505,34.673 65.532,34.646 ; R69.16@66.075,35.556 66.075,34.712 66.091,34.696 ; R68.9@67.642,38.833 67.642,37.793 67.666,37.77 ; R68.10@68.212,38.833 68.212,37.782 68.326,37.668 ; 68.682,37.871 68.712,37.902 R68.11@68.712,38.833 ; 69.19,37.643 69.212,37.665 R68.12@69.212,38.833 ; 69.672,37.77 69.712,37.81 R68.13@69.712,38.833 ; R68.14@70.212,38.833 70.212,37.84 70.256,37.795 ; R68.15@70.712,38.833 70.712,37.771 70.714,37.77 ; R68.16@71.282,38.833 71.282,37.862 71.374,37.77 ; R70.9@77.423,44.223 78.459,44.223 78.461,44.221 ; R70.10@77.423,44.793 78.397,44.793 78.41,44.78 ; R70.11@77.423,45.293 78.415,45.293 78.435,45.314 ; R70.12@77.423,45.793 78.458,45.793 78.588,45.923 ; R70.13@77.423,46.293 78.675,46.293 78.689,46.279 ; R70.14@77.423,46.793 78.403,46.793 78.41,46.787 ; R70.15@77.423,47.293 78.538,47.293 78.562,47.269 ; R70.16@77.423,47.863 78.527,47.863 78.537,47.854
  Top Layer w1: C213.2@89.248,78.181 U19.3@90.957,78.181 92.253,78.181 92.672,78.6 94.793,80.721 U19.8@96.145,80.721
  Bottom Layer w1: pad.0@79.146,49.733 79.146,52.527 80.239,53.619 90.703,53.619 93.137,56.053 pad.0@93.137,79.066 pad.0@93.833,79.761
DDR2_WE_B: R69.5 U1.F2 U2.K3 | length 32.8
  Top Layer w0.152: U1.F2@52.68,44.589 v1(53.18,44.089) ; v2(62.56,44.628) 62.56,43.764 ; R69.5@64.005,37.08 64.005,38.078 62.306,39.776 62.306,43.028 62.56,43.282 62.56,43.764 ; 65.667,49.017 63.93,49.017 62.125,47.211 62.125,46.58 61.341,45.796 60.63,45.796 60.249,45.415 60.249,45.009 60.604,44.653 61.366,44.653 61.57,44.45 61.57,43.739 61.773,43.536 62.332,43.536 62.56,43.764 ; 65.672,49.022 U2.K3@66.065,48.629
  Mid-Layer 1 w0.152: v1(53.18,44.089) 53.682,43.586 55.626,43.586 56.871,42.342 62.078,42.342 62.56,42.824 v2(62.56,44.628)
E-COL: U1.A4 X3.13 X3.14 | length 41.7
  Top Layer w0.152: U1.A4@50.68,39.589 v1(51.18,39.089) ; X3.13@59.37,8.191 X3.14@59.37,11.621 59.37,13.234 v2(59.37,13.449)
  Mid-Layer 1 w0.152: v1(51.18,39.089) 51.18,39.041 53.213,37.008 53.213,34.061 59.37,27.904 59.37,25.756 59.37,25.618 ccw(c59.69,25.618) 59.69,25.298 59.713,25.298 cw(c59.713,24.978) 60.033,24.978 60.033,24.704 cw(c59.713,24.704) 59.713,24.384 59.37,24.384 59.027,24.384 ccw(c59.027,24.064) 58.707,24.064 58.707,23.79 ccw(c59.027,23.79) 59.027,23.47 59.05,23.47 cw(c59.05,23.15) 59.37,23.15 59.37,22.555 59.37,21.565 59.37,21.427 ccw(c59.69,21.427) 59.69,21.107 59.73,21.107 cw(c59.73,20.787) 60.05,20.787 60.05,20.513 cw(c59.73,20.513) 59.73,20.193 59.37,20.193 59.01,20.193 ccw(c59.01,19.873) 58.69,19.873 58.69,19.599 ccw(c59.01,19.599) 59.01,19.279 59.37,19.279 59.73,19.279 cw(c59.73,18.959) 60.05,18.959 60.05,18.684 cw(c59.73,18.684) 59.73,18.364 59.37,18.364 59.01,18.364 ccw(c59.01,18.044) 58.69,18.044 58.69,17.77 ccw(c59.01,17.77) 59.01,17.45 59.05,17.45 cw(c59.05,17.13) 59.37,17.13 59.37,16.891 59.37,16.754 ccw(c59.69,16.754) 59.69,16.434 59.73,16.434 cw(c59.73,16.114) 60.05,16.114 60.05,15.839 cw(c59.73,15.839) 59.73,15.519 59.69,15.519 ccw(c59.69,15.199) 59.37,15.199 59.37,14.58 v2(59.37,13.449)
E-CRS: U1.C5 X3.15 X3.16 | length 41.7
  Top Layer w0.152: U1.C5@49.68,41.589 v1(50.18,41.089) ; X3.15@58.1,8.191 X3.16@58.1,11.621 v2(58.1,13.449)
  Mid-Layer 2 w0.152: v1(50.18,41.089) 50.18,41.057 50.698,40.538 50.698,38.583 51.841,37.44 51.841,34.722 58.1,28.463 58.1,25.171 58.1,25.034 ccw(c58.42,25.034) 58.42,24.714 58.426,24.714 cw(c58.426,24.394) 58.746,24.394 58.746,24.12 cw(c58.426,24.12) 58.426,23.8 58.1,23.8 57.774,23.8 ccw(c57.774,23.48) 57.454,23.48 57.454,23.205 ccw(c57.774,23.205) 57.774,22.885 58.1,22.885 58.426,22.885 cw(c58.426,22.565) 58.746,22.565 58.746,22.291 cw(c58.426,22.291) 58.426,21.971 58.1,21.971 57.774,21.971 ccw(c57.774,21.651) 57.454,21.651 57.454,21.377 ccw(c57.774,21.377) 57.774,21.057 58.1,21.057 58.426,21.057 cw(c58.426,20.737) 58.746,20.737 58.746,20.462 cw(c58.426,20.462) 58.426,20.142 58.42,20.142 ccw(c58.42,19.822) 58.1,19.822 58.1,18.085 v2(58.1,13.449)
E-GTXCLK: U1.A11 X3.45 X3.46 | length 41.7
  Top Layer w0.152: X3.45@39.05,8.191 X3.46@39.05,11.621 v2@39.05,13.234 ; U1.A11@43.68,39.589 v1(44.18,39.089)
  Mid-Layer 2 w0.152: v2(39.05,13.449) 40.234,14.633 40.234,15.834 cw(c40.554,15.834) 40.554,16.154 40.562,16.154 ccw(c40.562,16.474) 40.882,16.474 40.882,16.749 ccw(c40.562,16.749) 40.562,17.069 39.905,17.069 cw(c39.905,17.389) 39.585,17.389 39.585,17.663 cw(c39.905,17.663) 39.905,17.983 40.562,17.983 ccw(c40.562,18.303) 40.882,18.303 40.882,18.578 ccw(c40.562,18.578) 40.562,18.898 39.905,18.898 cw(c39.905,19.218) 39.585,19.218 39.585,19.492 cw(c39.905,19.492) 39.905,19.812 40.562,19.812 ccw(c40.562,20.132) 40.882,20.132 40.882,20.406 ccw(c40.562,20.406) 40.562,20.726 40.554,20.726 cw(c40.554,21.046) 40.234,21.046 40.234,22.032 cw(c40.554,22.032) 40.554,22.352 40.562,22.352 ccw(c40.562,22.672) 40.882,22.672 40.882,22.946 ccw(c40.562,22.946) 40.562,23.266 40.554,23.266 cw(c40.554,23.586) 40.234,23.586 40.234,24.994 40.708,25.468 40.804,25.564 ccw(c40.578,25.791) 40.804,26.017 40.788,26.033 cw(c41.015,26.26) 40.788,26.486 40.982,26.68 cw(c41.208,26.454) 41.435,26.68 41.677,26.437 41.92,26.195 ccw(c42.146,26.421) 42.373,26.195 42.567,26.389 ccw(c42.34,26.615) 42.567,26.841 42.55,26.858 cw(c42.777,27.084) 42.55,27.31 42.735,27.495 45.11,29.87 45.11,37.059 44.18,37.989 v1(44.18,39.089)
E-INT: U1.B16 X3.71 X3.72 | length 41.7
  Top Layer w0.152: X3.71@22.54,8.191 X3.72@22.54,11.621 v2(22.54,13.449) ; v1(38.18,40.089) U1.B16@38.68,40.589
  Mid-Layer 2 w0.152: v2(22.54,13.449) 22.54,15.494 22.54,16.292 cw(c22.86,16.292) 22.86,16.612 ; 22.819,16.612 ccw(c22.819,16.932) 23.139,16.932 23.139,17.206 ccw(c22.819,17.206) 22.819,17.526 22.54,17.526 22.261,17.526 cw(c22.261,17.846) 21.941,17.846 21.941,18.12 cw(c22.261,18.12) 22.261,18.44 22.54,18.44 22.86,18.44 ccw(c22.86,18.76) 23.18,18.76 23.18,19.035 ccw(c22.86,19.035) 22.86,19.355 cw(c22.86,19.675) 22.54,19.675 22.54,19.812 22.54,20.381 37.637,35.478 37.637,39.546 v1(38.18,40.089)
E-MDC: U1.A18 X3.79 X3.80 | length 41.7
  Top Layer w0.152: X3.79@17.46,8.191 X3.80@17.46,11.621 v2(17.46,13.449) ; v1(36.18,39.089) U1.A18@36.68,39.589
  Mid-Layer 2 w0.152: v2(17.46,13.449) 17.46,13.716 17.46,13.853 cw(c17.78,13.853) 17.78,14.173 ; 17.647,14.173 ccw(c17.647,14.493) 17.967,14.493 17.967,14.768 ccw(c17.647,14.768) 17.647,15.088 17.46,15.088 17.273,15.088 cw(c17.273,15.408) 16.953,15.408 16.953,15.682 cw(c17.273,15.682) 17.273,16.002 17.46,16.002 17.78,16.002 ccw(c17.78,16.322) 18.1,16.322 18.1,16.596 ccw(c17.78,16.596) 17.78,16.916 cw(c17.78,17.236) 17.46,17.236 17.46,17.374 17.46,17.917 36.18,36.637 v1(36.18,39.089)